# Altium PCB wius.PcbDoc
Units mm, origin at the board's own origin, x right, y up, seen from the top; angles counter-clockwise.
Board outline 54.2 x 28 mm, 6 copper layers (Top Layer, Int1 (GND), Int2 (Sign), Int3 (Sign), Int4 (PWR), Bottom Layer), stack 1.551 mm thick; 81 components, 82 nets, 371 pads, 7 vias.
Unrouted connection lines stored in the file: 174.
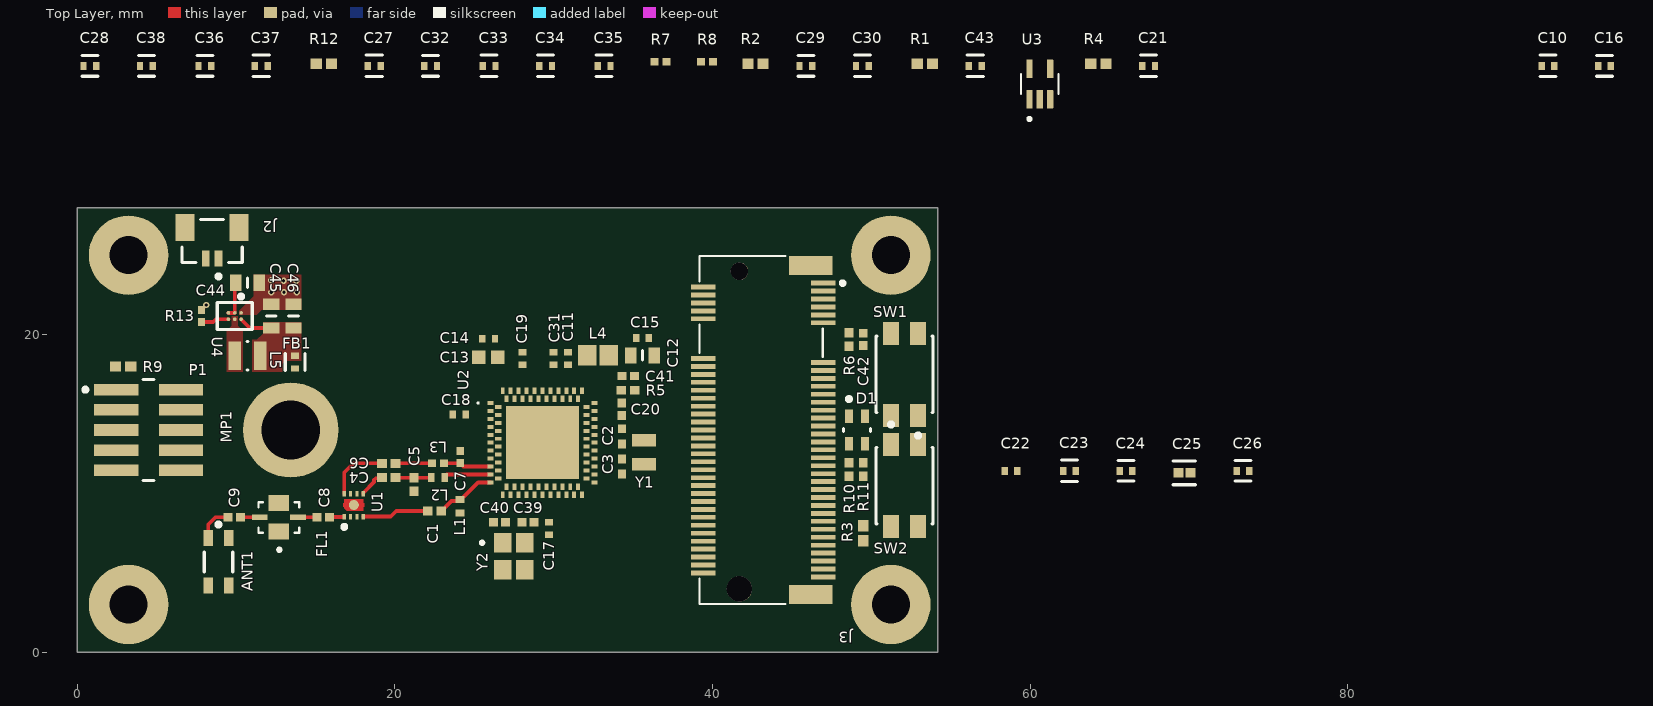
[diagram p0: Top Layer view]
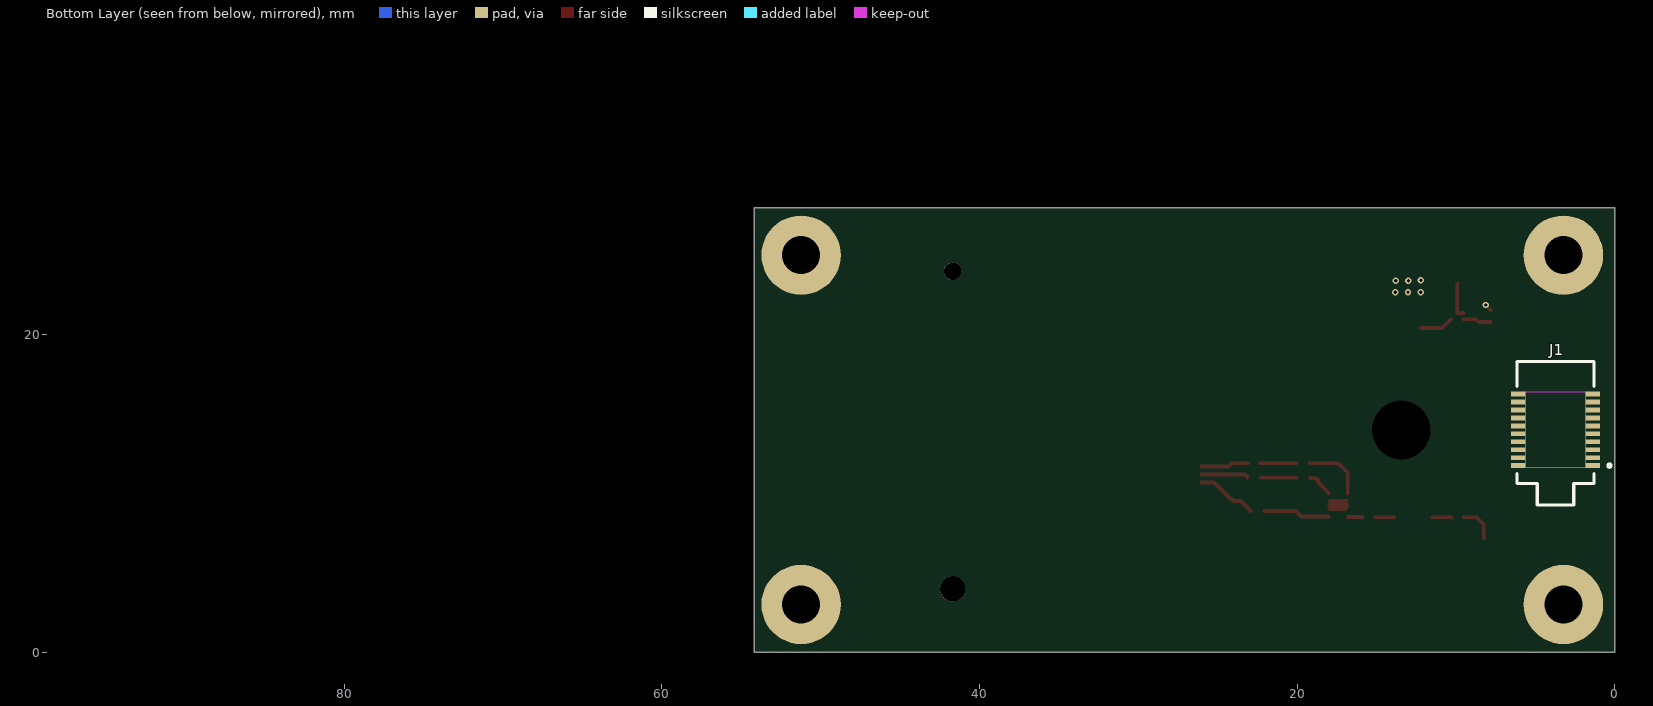
[diagram p1: Bottom Layer view, seen from below]
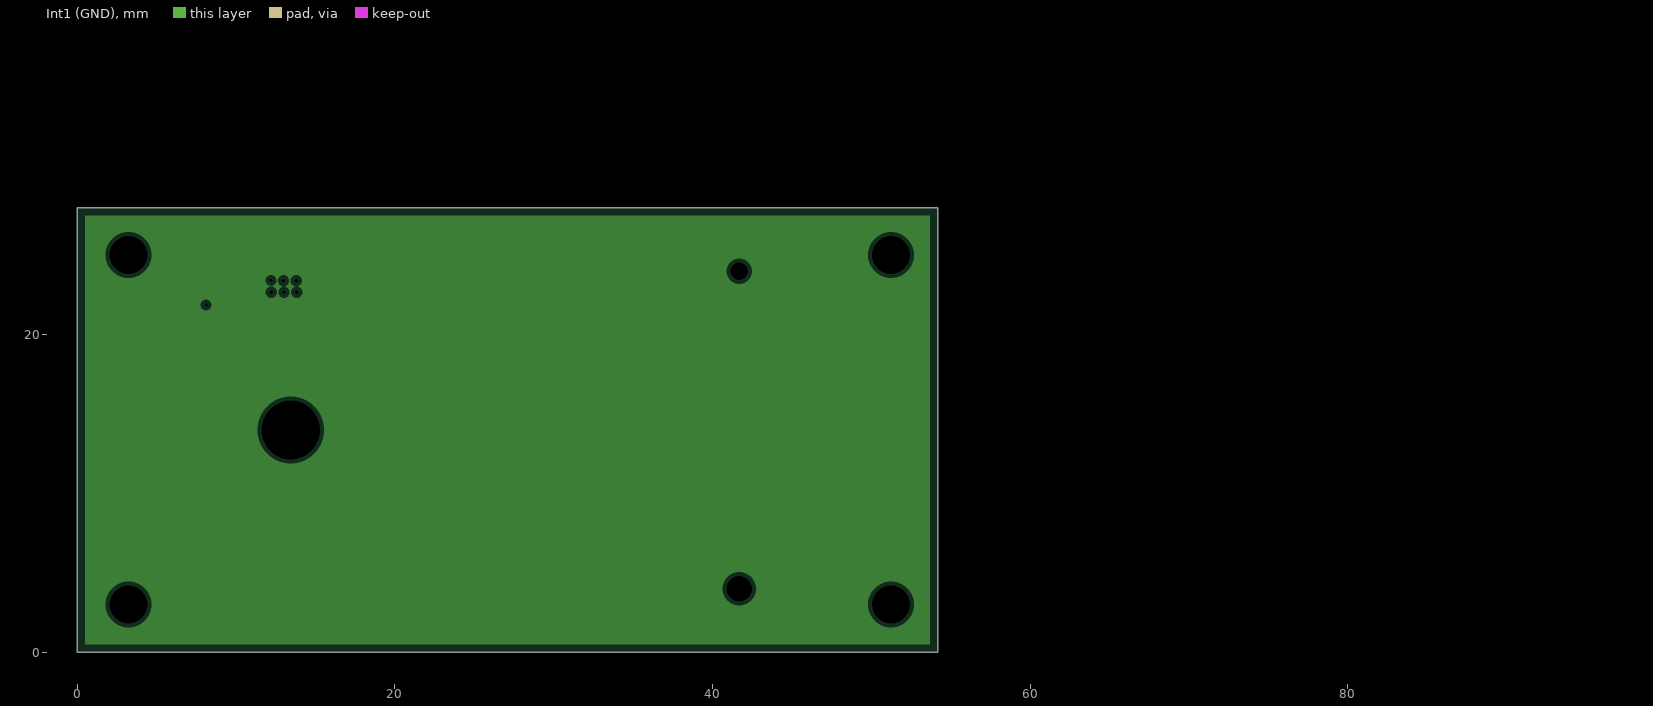
[diagram p2: Int1 (GND), clearances drawn from the general rule]
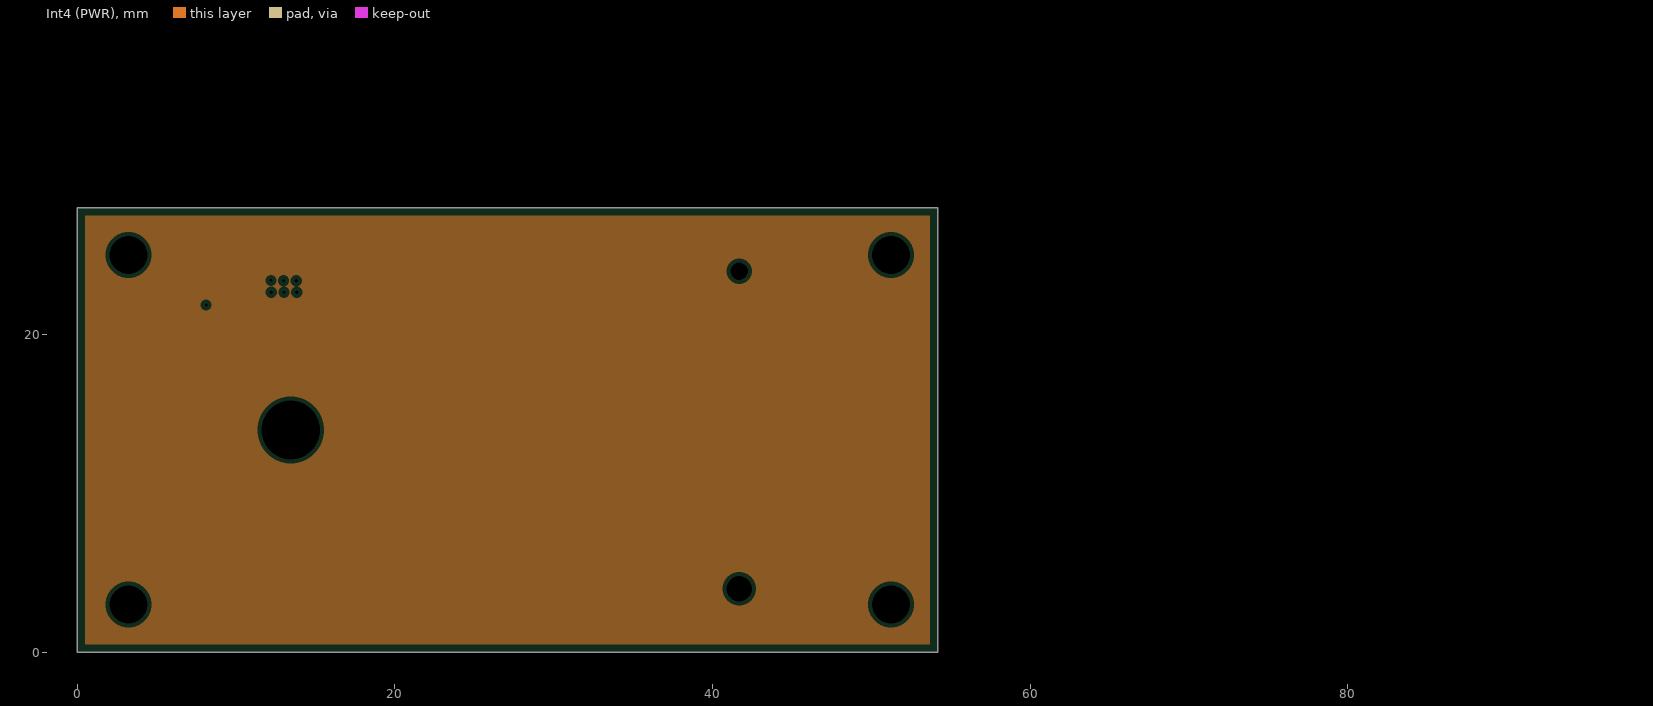
[diagram p3: Int4 (PWR), clearances drawn from the general rule]

## Layer stack, top to bottom
Top Solder: solder mask 0.0254, SM-001, Dk 4
Top Layer: signal copper 0.035
Dielectric 1: prepreg 0.0711, PP-006, Dk 4.1
Dielectric 2: prepreg 0.0711, PP-006, Dk 4.1
Int1 (GND): plane copper 0.035
Dielectric 3: core 0.4572, Core-035, Dk 4.7
Int2 (Sign): signal copper 0.035
Dielectric 4: prepreg 0.0711, PP-006, Dk 4.1
Dielectric 5: prepreg 0.0711, PP-006, Dk 4.1
Int3 (Sign): signal copper 0.035
Dielectric 6: core 0.4572, Core-035, Dk 4.7
Int4 (PWR): plane copper 0.035
Dielectric 7: prepreg 0.0711, PP-006, Dk 4.1
Dielectric 8: prepreg 0.0711, PP-006, Dk 4.1
Bottom Layer: signal copper 0.035
Bottom Solder: solder mask 0.0254, SM-001, Dk 4

## Board outline
0,0 0,28 54.2,28 54.2,0

## Design rules (kind name [scope] priority, off if disabled: settings)
BoardOutlineClearance [All] p1: gap=0 ignorepadtopadclearanceinfootprint=FALSE except(0.5: Arc-OutlineEdge Track-OutlineEdge SMDPad-OutlineEdge THPad-OutlineEdge Via-OutlineEdge Fill-OutlineEdge Poly-OutlineEdge Region-OutlineEdge Text-OutlineEdge)
Clearance [All] p1: gap=0.051 ignorepadtopadclearanceinfootprint=FALSE
ComponentClearance [All] p1: gap=0.17 collisioncheckmode=3 verticalgap=0.254 showdistances=FALSE
DiffPairsRouting [All] p1: maxlimit=0.27 minlimit=0.21 mostfreqgap=0.27 toplayer_maxgap=0.21 toplayer_prefgap=0.21 toplayer_minwidth=0.18 toplayer_maxwidth=0.18 toplayer_prefwidth=0.18 midlayer1_prefgap=0.254 midlayer1_minwidth=0.381 midlayer1_maxwidth=0.381 midlayer1_prefwidth=0.381 midlayer2_mingap=0.25 midlayer2_minwidth=0.11 midlayer2_maxwidth=0.11 midlayer2_prefwidth=0.11 bottomlayer_maxgap=0.21 bottomlayer_prefgap=0.21 bottomlayer_minwidth=0.18 bottomlayer_maxwidth=0.18 bottomlayer_prefwidth=0.18 maxuncoupledlength=50
FanoutControl Fanout_BGA [IsBGA] p1: bgadir=Out bgaviamode=Centered fanoutstyle=UnderPads fanoutdirection=Alternating viagrid=0.025 // Fanout_BGA (Default Rule)
Height [All] p1: minheight=0 maxheight=10 prefheight=1.524
HoleSize [All] p1: absolutevalues=TRUE maxlimit=5 minlimit=0.15 maxpercent=80.000 minpercent=20.000
MatchedLengths [All] p1: tolerance=0.1 checknetsindiffpair=TRUE checkdiffpairvsdiffpair=FALSE checkxsignals=FALSE checkothers=FALSE
MatchedLengths MatchedLengths_sdio [InNetClass('SDIO')] p2: tolerance=0.2 checknetsindiffpair=FALSE checkdiffpairvsdiffpair=TRUE checkxsignals=TRUE checkothers=TRUE
MatchedLengths MatchedLengths_spi_flash [InNetClass('SPI_FLASH')] p3: tolerance=0.2 checknetsindiffpair=FALSE checkdiffpairvsdiffpair=TRUE checkxsignals=TRUE checkothers=TRUE
MinimumAnnularRing MinimumAnnularRing_hole [All] p1: minimumring=0.127
MinimumAnnularRing MinimumAnnularRing_via [IsVia] p2: minimumring=0.076
MinimumSolderMaskSliver [All] p1: minsoldermaskwidth=0.076
PlaneClearance [All] p1: clearance=0.25
PlaneConnect [All] p1: pad.planeconnectstyle=Relief pad.reliefexpansion=0.16 pad.reliefentries=4 pad.reliefconductorwidth=0.16 pad.reliefairgap=0.16 via.planeconnectstyle=Direct via.reliefexpansion=0.16 via.reliefentries=4 via.reliefconductorwidth=0.16 via.reliefairgap=0.16
PolygonConnect PolygonConnect_1 [InNet('GND') vs (InPadClass('All Pads'))] p1: connectstyle=Relief reliefconductorwidth=0.254 reliefentries=4 polygonreliefangle="90 Angle" airgapwidth=0.2
PolygonConnect [Not InNet('GND') or Not InNet('AGND')] p2: connectstyle=Direct reliefconductorwidth=0.254 reliefentries=4 polygonreliefangle="90 Angle" airgapwidth=0.2
RoutingVias [All] p1: holewidth=0.2 width=0.4 viastyle="Through Hole" minholewidth=0.15 minwidth=0.302 maxholewidth=0.4 maxwidth=1.27
SilkToSilkClearance [All] p1: silktosilkclearance=0.01
SilkToSolderMaskClearance [IsPad] p1: minsilkscreentomaskgap=0.01 clearancetoexposedcopper=TRUE
SolderMaskExpansion SolderMaskExpansion_1 [isvia] p1: expansion=0.102 istentingtop=TRUE
SolderMaskExpansion [All] p2: expansion=0.015 istentingtop=FALSE
UnRoutedNet [All] p1: checkbadconnections=TRUE
ViasUnderSMD [All] p1: allowed=TRUE
Width "Schematic Width Constraint_13" [InNet('GND')] p1: maxlimit=0.237 minlimit=0.153 preferedwidth=0.237 toplayer_minwidth=0.237 midlayer1_maxwidth=0.153 midlayer1_prefwidth=0.153 midlayer2_maxwidth=0.153 midlayer2_prefwidth=0.153 bottomlayer_minwidth=0.237 impedanceprofiledriven=TRUE impedanceprofileid={907723B0-F067-4E6D-A726-1A265D9D0D74} impedanceprofilevalue=50.000000 minimp=50.000000 maximp=50.000000 favimp=50.000000
Width "Schematic Width Constraint_12" [InNet('VOUTLDOAFE')] p2: maxlimit=0.237 minlimit=0.153 preferedwidth=0.237 toplayer_minwidth=0.237 midlayer1_maxwidth=0.153 midlayer1_prefwidth=0.153 midlayer2_maxwidth=0.153 midlayer2_prefwidth=0.153 bottomlayer_minwidth=0.237 impedanceprofiledriven=TRUE impedanceprofileid={907723B0-F067-4E6D-A726-1A265D9D0D74} impedanceprofilevalue=50.000000 minimp=50.000000 maximp=50.000000 favimp=50.000000
Width "Schematic Width Constraint_10" [InNet('NetC8_1')] p3: maxlimit=0.237 minlimit=0.153 preferedwidth=0.237 toplayer_minwidth=0.237 midlayer1_maxwidth=0.153 midlayer1_prefwidth=0.153 midlayer2_maxwidth=0.153 midlayer2_prefwidth=0.153 bottomlayer_minwidth=0.237 impedanceprofiledriven=TRUE impedanceprofileid={907723B0-F067-4E6D-A726-1A265D9D0D74} impedanceprofilevalue=50.000000 minimp=50.000000 maximp=50.000000 favimp=50.000000
Width "Schematic Width Constraint_8" [InNet('NetC6_2')] p4: maxlimit=0.237 minlimit=0.153 preferedwidth=0.237 toplayer_minwidth=0.237 midlayer1_maxwidth=0.153 midlayer1_prefwidth=0.153 midlayer2_maxwidth=0.153 midlayer2_prefwidth=0.153 bottomlayer_minwidth=0.237 impedanceprofiledriven=TRUE impedanceprofileid={907723B0-F067-4E6D-A726-1A265D9D0D74} impedanceprofilevalue=50.000000 minimp=50.000000 maximp=50.000000 favimp=50.000000
Width "Schematic Width Constraint_7" [InNet('NetANT1_1')] p5: maxlimit=0.237 minlimit=0.153 preferedwidth=0.237 toplayer_minwidth=0.237 midlayer1_maxwidth=0.153 midlayer1_prefwidth=0.153 midlayer2_maxwidth=0.153 midlayer2_prefwidth=0.153 bottomlayer_minwidth=0.237 impedanceprofiledriven=TRUE impedanceprofileid={907723B0-F067-4E6D-A726-1A265D9D0D74} impedanceprofilevalue=50.000000 minimp=50.000000 maximp=50.000000 favimp=50.000000
Width "Schematic Width Constraint_6" [InNet('NetC9_1')] p6: maxlimit=0.237 minlimit=0.153 preferedwidth=0.237 toplayer_minwidth=0.237 midlayer1_maxwidth=0.153 midlayer1_prefwidth=0.153 midlayer2_maxwidth=0.153 midlayer2_prefwidth=0.153 bottomlayer_minwidth=0.237 impedanceprofiledriven=TRUE impedanceprofileid={907723B0-F067-4E6D-A726-1A265D9D0D74} impedanceprofilevalue=50.000000 minimp=50.000000 maximp=50.000000 favimp=50.000000
Width "Schematic Width Constraint_5" [InNet('NetL2_2')] p7: maxlimit=0.237 minlimit=0.153 preferedwidth=0.237 toplayer_minwidth=0.237 midlayer1_maxwidth=0.153 midlayer1_prefwidth=0.153 midlayer2_maxwidth=0.153 midlayer2_prefwidth=0.153 bottomlayer_minwidth=0.237 impedanceprofiledriven=TRUE impedanceprofileid={907723B0-F067-4E6D-A726-1A265D9D0D74} impedanceprofilevalue=50.000000 minimp=50.000000 maximp=50.000000 favimp=50.000000
Width "Schematic Width Constraint_4" [InNet('NetC6_1')] p8: maxlimit=0.237 minlimit=0.153 preferedwidth=0.237 toplayer_minwidth=0.237 midlayer1_maxwidth=0.153 midlayer1_prefwidth=0.153 midlayer2_maxwidth=0.153 midlayer2_prefwidth=0.153 bottomlayer_minwidth=0.237 impedanceprofiledriven=TRUE impedanceprofileid={907723B0-F067-4E6D-A726-1A265D9D0D74} impedanceprofilevalue=50.000000 minimp=50.000000 maximp=50.000000 favimp=50.000000
Width "Schematic Width Constraint_3" [InNet('NetC1_1')] p9: maxlimit=0.237 minlimit=0.153 preferedwidth=0.237 toplayer_minwidth=0.237 midlayer1_maxwidth=0.153 midlayer1_prefwidth=0.153 midlayer2_maxwidth=0.153 midlayer2_prefwidth=0.153 bottomlayer_minwidth=0.237 impedanceprofiledriven=TRUE impedanceprofileid={907723B0-F067-4E6D-A726-1A265D9D0D74} impedanceprofilevalue=50.000000 minimp=50.000000 maximp=50.000000 favimp=50.000000
Width "Schematic Width Constraint_2" [InNet('NetC4_2')] p10: maxlimit=0.237 minlimit=0.153 preferedwidth=0.237 toplayer_minwidth=0.237 midlayer1_maxwidth=0.153 midlayer1_prefwidth=0.153 midlayer2_maxwidth=0.153 midlayer2_prefwidth=0.153 bottomlayer_minwidth=0.237 impedanceprofiledriven=TRUE impedanceprofileid={907723B0-F067-4E6D-A726-1A265D9D0D74} impedanceprofilevalue=50.000000 minimp=50.000000 maximp=50.000000 favimp=50.000000
Width "Schematic Width Constraint_1" [InNet('NetC4_1')] p11: maxlimit=0.237 minlimit=0.153 preferedwidth=0.237 toplayer_minwidth=0.237 midlayer1_maxwidth=0.153 midlayer1_prefwidth=0.153 midlayer2_maxwidth=0.153 midlayer2_prefwidth=0.153 bottomlayer_minwidth=0.237 impedanceprofiledriven=TRUE impedanceprofileid={907723B0-F067-4E6D-A726-1A265D9D0D74} impedanceprofilevalue=50.000000 minimp=50.000000 maximp=50.000000 favimp=50.000000
Width "Schematic Width Constraint" [InNet('NetC7_1')] p12: maxlimit=0.237 minlimit=0.153 preferedwidth=0.237 toplayer_minwidth=0.237 midlayer1_maxwidth=0.153 midlayer1_prefwidth=0.153 midlayer2_maxwidth=0.153 midlayer2_prefwidth=0.153 bottomlayer_minwidth=0.237 impedanceprofiledriven=TRUE impedanceprofileid={907723B0-F067-4E6D-A726-1A265D9D0D74} impedanceprofilevalue=50.000000 minimp=50.000000 maximp=50.000000 favimp=50.000000
Width "Schematic Width Constraint_11" [InNet('NetANT1_1')] p13: maxlimit=0.375 minlimit=0.375 preferedwidth=0.375 impedanceprofiledriven=TRUE minimp=50.000000 maximp=50.000000 favimp=50.000000
Width "Schematic Width Constraint_9" [InNet('NetC1_2')] p14: maxlimit=0.375 minlimit=0.375 preferedwidth=0.375 impedanceprofiledriven=TRUE minimp=50.000000 maximp=50.000000 favimp=50.000000
Width Width_power_lines [InNetClass('Power')] p15: maxlimit=1 minlimit=0.051 preferedwidth=0.35 minimp=50.000000 maximp=50.000000 favimp=50.000000
Width [All] p16: maxlimit=1 minlimit=0.051 preferedwidth=0.2 toplayer_maxwidth=0.236 midlayer1_prefwidth=0.1 midlayer2_prefwidth=0.1 bottomlayer_maxwidth=0.236 minimp=50.000000 maximp=50.000000 favimp=50.000000
19 further rules are at their usual default settings.

## Classes and differential pairs
component class "SiWG917 POWER & I/O": C10 C11 C12 C13 C14 C16 C18 C19 C20 C21 C22 C23 C24 C25 C26 C27 C28 C29 C30 C31 C32 C33 C34 C35 C36 C37 C38 C39 C40 C43 L4 R1 R2 R4 R7 R8 R12 U2 U3 Y2
component class "RF FRONTEND & CLOCKS": ANT1 C1 C2 C3 C4 C5 C6 C7 C8 C9 FL1 L1 L2 L3 U1 Y1
component class "Power conversion": C44 C45 C46 FB1 J2 L5 R13 U4
component class "GAPmod interface": J3 MP1
component class "DEBUG, RESET & POC_IN, PROGRAMMING INTERFACE": C41 C42 D1 P1 R3 R5 R6 R9 R10 R11 SW1 SW2
component class Connectors: J1

## Components (designator, comment, footprint, x,y, rotation, side; value= is the part's Value field where it differs from the comment)
ANT1 "2450AT18D0100001E" FP-2450AT18D0100001E-MFG 8.9,5.7 r270 top
C1 "8.2p" FP-GJM155-0_05-IPC_B 22.5,8.9 r0 top
C2 "12p" FP-GRM155-0_05-MFG#1 34.3,13.6 r90 top
C3 "12p" FP-GRM155-0_05-MFG#1 34.3,11.7 r270 top
C4 "8.2p" FP-GJM155-0_05-IPC_B 19.621,11 r0 top
C5 "1.3p" FP-GJM155-0_05-IPC_B 21.221,10.571 r270 top
C6 "8.2p" FP-GJM155-0_05-IPC_B 19.621,11.9 r0 top
C7 "0.7p" FP-GJM155-0_05-IPC_C 24.121,12.3 r90 top
C8 "18p" CAPC1005X55X25LL05T10 15.5,8.5 r180 top
C9 "18p" CAPC1005X55X25LL05T10 9.9,8.5 r180 top
C10 "100n" FP-GRT155-0_05-MFG 92.621,36.93 r0 top
C11 "1u" FP-GRM155-0_05-MFG#2 30.9,18.5 r90 top
C12 "10u" CAPC1608X100N 35.6,18.7 r180 top
C13 "10u" FP-GRM188-0_15-IPC_C 25.879,18.57 r180 top
C14 "100n" FP-GRT155-0_05-MFG 25.912,19.746 r180 top
C15 "100n" FP-GRT155-0_05-MFG 35.6,19.8 r0 top
C16 "1u" FP-GRM155-0_05-MFG#2 96.177,36.93 r0 top
C17 "100n" FP-GRT155-0_05-MFG 29.7,7.8 r270 top
C18 "100n" FP-GRT155-0_05-MFG 24.062,14.965 r180 top
C19 "100n" FP-GRT155-0_05-MFG 28.046,18.504 r90 top
C20 "10n" CAPC1005X55X25LL05T10 34.3,15.3 r90 top
C21 "100n" FP-GRT155-0_05-MFG 67.475,36.93 r0 top
C22 "1u" FP-GRM155-0_05-MFG#2 58.804,11.43 r0 top
C23 "100n" FP-GRT155-0_05-MFG 62.487,11.43 r0 top
C24 "1u" FP-GRM155-0_05-MFG#2 66.043,11.43 r0 top
C25 "2.2u" FP-GRM155-0_2-IPC_C 69.726,11.303 r0 top
C26 "1u" FP-GRM155-0_05-MFG#2 73.409,11.43 r0 top
C27 "100n" FP-GRT155-0_05-MFG 18.707,36.93 r0 top
C28 "1u" FP-GRM155-0_05-MFG#2 0.8,36.93 r0 top
C29 "1u" FP-GRM155-0_05-MFG#2 45.885,36.93 r0 top
C30 "100n" FP-GRT155-0_05-MFG 49.441,36.93 r0 top
C31 "100n" FP-GRT155-0_05-MFG 30,18.5 r90 top
C32 "1u" FP-GRM155-0_05-MFG#2 22.263,36.93 r0 top
C33 "100n" FP-GRT155-0_05-MFG 25.946,36.93 r0 top
C34 "100n" FP-GRT155-0_05-MFG 29.502,36.93 r0 top
C35 "100n" FP-GRT155-0_05-MFG 33.185,36.93 r0 top
C36 "1u" FP-GRM155-0_05-MFG#2 8.039,36.93 r0 top
C37 "100n" FP-GRT155-0_05-MFG 11.595,36.93 r0 top
C38 "1u" FP-GRM155-0_05-MFG#2 4.356,36.93 r0 top
C39 "Capacitor 10 pF +/- 0.25 pF 50 V 0402" CAPC1005X55X30LL05T10 28.4,8.2 r0 top value=10pF
C40 "Capacitor 10 pF +/- 0.25 pF 50 V 0402" CAPC1005X55X30LL05T10 26.6,8.2 r180 top value=10pF
C41 "10n" CAPC1005X55X25LL05T10 34.7,17.4 r0 top
C42 "10n" CAPC1005X55X25LL05T10 49.5,19.7 r270 top
C43 "100n" FP-GRT155-0_05-MFG 56.553,36.93 r0 top
C44 "10u" CAPC1608X100N 10.725,23.275 r180 top
C45 "10u" CAPC1608X100N 12.225,21.175 r270 top
C46 "10u" CAPC1608X100N 13.625,21.175 r270 top
D1 "RED" FP-APTB1615SURKCGKC-F01-MFG 49.1,14 r90 top
FB1 "70m" FP-BLM15-0_05-MFG 13.725,18.275 r270 top
FL1 "2450BP15E0100E" FIL_2450BP15E0100E 12.7,8.5 r180 top
J1 "SS5-10-3.00-X-D-K-XX" SAMTEC_SS5-10-3.00-X-D-K-XX 3.74,14.01 r270 bottom locked
J2 "SM02B-SURS-TF(LF)(SN)" FP-SM02B-SURS-TF_LF_SN-MFG 8.5,25.9 r180 top
J3 "2199230-5" TE_2199230-5 41.7,14 r270 top locked
L1 "6.2n" FP-LQG15WH_02-IPC_C 24.1,9.2 r270 top
L2 "3.4n" FP-LQG15WH_02-IPC_C 22.721,11 r0 top
L3 "3.3n" FP-LQG15HH_02-IPC_C 22.721,11.9 r0 top
L4 "1u" FP-DFE201210U-IPC_C 32.8,18.7 r0 top
L5 "2.2u" FP-DFE201612C-MFG 10.725,18.675 r0 top
MP1 "9774025151R" 9774025151 13.45,14 r0 top
P1 "Mini Simplicity" SMTC-FTSH-105-01-L-DV-K_V 4.5,14 r270 top
R1 "Resistor 0R 0402 63 mW" RESC1005X40X25ML05T10 53.378,37.057 r0 top value=0
R2 "Resistor 0R 0402 63 mW" RESC1005X40X25ML05T10 42.71,37.057 r0 top value=0
R3 "100" RESC1005X40X25ML05T10 49.5,7.5 r90 top
R4 "Resistor 0R 0402 63 mW" RESC1005X40X25ML05T10 64.3,37.057 r0 top value=0
R5 "100k" RESC1005X40X25NL05T10 34.7,16.5 r0 top
R6 "100k" RESC1005X40X25NL05T10 48.6,19.7 r270 top
R7 "1k" RESC1005X40X25LL05T10 36.741,37.184 r0 top
R8 "1k" RESC1005X40X25LL05T10 39.662,37.184 r0 top
R9 "Resistor 0R 0402 63 mW" RESC1005X40X25ML05T10 2.9,18 r0 top value=0
R10 "280" RESC1005X40X25NL05T10 48.6,11.5 r90 top
R11 "280" RESC1005X40X25NL05T10 49.5,11.5 r90 top
R12 "Resistor 0R 0402 63 mW" RESC1005X40X25ML05T10 15.532,37.057 r0 top value=0
R13 "267k" RESC1005X40X25LL05T10 7.825,21.175 r270 top
SW1 "EVQ-P2402M" FP-EVQ-P2402M-MFG 52.1,17.5 r180 top
SW2 "EVQ-P2402M" FP-EVQ-P2402M-MFG 52.1,10.5 r0 top
U1 "SKY13317-373LF" FP-SKY13317-373LF-MFG 17.421,9.275 r90 top
U2 "IC RF TXRX+MCU WIFI BLE 84QFN" SIWG917M110LGTBA 29.3,13.2 r0 top
U3 "NC7SV17P5X" SOT65P210X110-5N 60.617,35.787 r90 top
U4 "TPS62840YBGR" FP-YBG0006-MFG 9.925,21.175 r270 top
Y1 "32.768KHZ" XTAL_CM8V-T1A-32.768KHZ-7PF-20PPM-TA-QC 35.7,12.6 r270 top
Y2 "FA-20H_40.0000MF10Z-K3" XTAL_FA-20H_40.0000MF10Z-K3 27.5,6.05 r0 top

## Footprints (in the part's own frame and the unit in brackets; to place one, negate y for a bottom-side part, rotate by r counter-clockwise, add the part's x,y. Pads: shape width x height; smd on the part's side, far side on the other; paste and mask are expansions set on the pad)
9774025151 [mm] "SMT Steel Spacer with internal Thread M2.5, height 2.5mm"
  round 6 / inner round 0 / far side round 0 hole 3.7 unplated: 1(0,0)
  body extent -2.55,-2.55 2.55,2.55, height 2.5
CAPC1005X55X25LL05T10 [mm] "Chip Capacitor, 2-Leads, Body 1.00x0.50mm, IPC High Density"
  rect 0.56x0.52 smd: 1(-0.39,0) 2(0.39,0)
  body extent -0.53,-0.28 0.53,0.28, height 0.55
CAPC1005X55X30LL05T10 [mm] "Chip Capacitor, 2-Leads, Body 1.05x0.55mm, IPC High Density"
  rect 0.56x0.52 smd: 1(-0.38,0) 2(0.38,0)
  body extent -0.53,-0.28 0.53,0.28, height 0.55
CAPC1608X100N [mm]
  rect 0.72x1.02 smd: 1(-0.75,0) 2(0.75,0)
  silkscreen extent 0,-0.3 0,0.3, body extent -0.8,-0.4 0.8,0.4, height 1
FIL_2450BP15E0100E [mm]
  rect 1.3x1 smd: 1(0,0.9) 3(0,-0.9)
  rect 1x0.35 smd: 2(1.2,0) 4(-1.2,0)
  silkscreen extent -1.28,-0.96 1.28,2.14
FP-2450AT18D0100001E-MFG [mm]
  rect 1x0.6 smd paste+0 mask+0: 1(-1.5,-0.65) 2(1.5,-0.65) 3(1.5,0.65) 4(-1.5,0.65)
  silkscreen extent -2.47,-0.9 0.63,0.9, body extent -2.1,-1.05 2.1,1.05, height 0.25
FP-APTB1615SURKCGKC-F01-MFG [mm]
  rect 0.85x0.5 smd paste+0 mask+0: 1(0.875,0.5) 2(-0.875,0.5) 3(0.875,-0.5) 4(-0.875,-0.5)
  silkscreen extent -0.08,-0.85 2.07,0.85, body extent -1.4,-0.95 1.4,0.95, height 0.25
FP-BLM15-0_05-MFG [mm]
  rect 0.4x0.5 smd paste+0 mask+0: 1(-0.4,0) 2(0.4,0)
  silkscreen extent -0.53,-0.63 0.52,0.63, body extent -0.7,-0.38 0.7,0.38, height 0.25
FP-DFE201210U-IPC_C [mm]
  rect 1.154x1.306 smd paste+0 mask+0: 1(-0.676,0) 2(0.676,0)
  body extent -1.35,-0.8 1.35,0.8, height 0.25
FP-DFE201612C-MFG [mm]
  rect 0.8x1.8 smd paste+0 mask+0: 1(-0.8,0) 2(0.8,0)
  silkscreen extent -0.03,-0.9 0.03,0.9, body extent -1.3,-1 1.3,1, height 0.25
FP-EVQ-P2402M-MFG [mm]
  rect 1x1.45 smd paste+0 mask+0: 1(-0.85,2.575) 2(0.85,2.575) 3(-0.85,-2.575) 4(0.85,-2.575)
  silkscreen extent -1.8,-2.4 1.8,3.97, body extent -1.9,-3.4 1.9,3.4, height 0.25
FP-GJM155-0_05-IPC_B [mm]
  rect 0.615x0.572 smd paste+0 mask+0: 1(-0.429,0) 2(0.429,0)
  body extent -0.89,-0.44 0.89,0.44, height 0.25
FP-GJM155-0_05-IPC_C [mm]
  rect 0.515x0.472 smd paste+0 mask+0: 1(-0.379,0) 2(0.379,0)
  body extent -0.74,-0.38 0.74,0.38, height 0.25
FP-GRM155-0_2-IPC_C [mm]
  rect 0.628x0.606 smd paste+0 mask+0: 1(-0.389,0) 2(0.389,0)
  silkscreen extent -0.7,-0.75 0.7,0.75, body extent -0.8,-0.45 0.8,0.45, height 0.25
FP-GRM155-0_05-MFG#1 [mm]
  rect 0.55x0.5 smd paste+0 mask+0: 1(-0.475,0) 2(0.475,0)
  body extent -0.85,-0.38 0.85,0.38, height 0.25
FP-GRM155-0_05-MFG#2 [mm]
  rect 0.4x0.5 smd paste+0 mask+0: 1(-0.4,0) 2(0.4,0)
  body extent -0.7,-0.38 0.7,0.38, height 0.25
FP-GRM188-0_15-IPC_C [mm]
  rect 0.856x0.858 smd paste+0 mask+0: 1(-0.601,0) 2(0.601,0)
FP-GRT155-0_05-MFG [mm]
  rect 0.4x0.5 smd paste+0 mask+0: 1(-0.4,0) 2(0.4,0)
  silkscreen extent -0.5,-0.67 0.5,0.67, body extent -0.7,-0.38 0.7,0.38, height 0.25
FP-LQG15HH_02-IPC_C [mm]
  rect 0.515x0.472 smd paste+0 mask+0: 1(-0.379,0) 2(0.379,0)
  body extent -0.74,-0.38 0.74,0.38, height 0.25
FP-LQG15WH_02-IPC_C [mm]
  rect 0.427x0.572 smd paste+0 mask+0: 1(-0.423,0) 2(0.423,0)
  body extent -0.74,-0.43 0.74,0.43, height 0.25
FP-SKY13317-373LF-MFG [mm]
  rect 0.35x0.2 smd paste+0 mask+0: 1(-0.725,0.6) 2(-0.725,0.2) 3(-0.725,-0.2) 4(-0.725,-0.6) 5(0.725,-0.6) 6(0.725,-0.2) 7(0.725,0.2) 8(0.725,0.6)
  round 0.63 smd paste+0 mask+0: 9(0,0)
  Top Layer region: 0.35,0.6 0.1,0.6 0.1,0.65 -0.1,0.65 -0.1,0.6 -0.2,0.6 -0.35,0.45 -0.35,-0.6 -0.1,-0.6 -0.1,-0.65 0.1,-0.65 0.1,-0.6 0.35,-0.6
  silkscreen extent -1.5,0.47 -1.25,0.72, body extent -1,-0.87 1,0.87, height 0.25
FP-SM02B-SURS-TF_LF_SN-MFG [mm]
  rect 0.5x1 smd paste+0 mask+0: 1(-0.4,1.1) 2(0.4,1.1)
  rect 1.2x1.7 smd paste+0 mask+0: 3(-1.7,-0.85) 4(1.7,-0.85)
  silkscreen extent -1.9,-1.35 1.9,2.35, body extent -2.4,-1.8 2.4,1.7, height 0.25
FP-YBG0006-MFG [mm]
  round 0.23 smd paste-1000 mask-1000: A1(-0.2,0.4) A2(0.2,0.4) B1(-0.2,0) B2(0.2,0) C1(-0.2,-0.4) C2(0.2,-0.4)
  silkscreen extent -1.35,-1.1 0.85,1.1, body extent -1,-1.25 1,1.25, height 0.25
RESC1005X40X25LL05T10 [mm] "Chip Resistor, 2-Leads, Body 1.00x0.50mm, IPC High Density"
  rect 0.5x0.45 smd: 1(-0.375,0) 2(0.375,0)
  body extent -0.53,-0.27 0.53,0.28, height 0.4
RESC1005X40X25ML05T10 [mm] "Chip Resistor, 2-Leads, Body 1.05x0.55mm, IPC Low Density"
  rect 0.7x0.65 smd: 1(-0.475,0) 2(0.475,0)
  body extent -0.53,-0.28 0.53,0.28, height 0.4
RESC1005X40X25NL05T10 [mm] "Chip Resistor, 2-Leads, Body 1.00x0.50mm, IPC Medium Density"
  rect 0.6x0.55 smd: 1(-0.425,0) 2(0.425,0)
  body extent -0.53,-0.27 0.53,0.28, height 0.4
SAMTEC_SS5-10-3.00-X-D-K-XX [mm]
  rect 0.3x0.93 smd: 01(2.25,2.335) 02(2.25,-2.335) 03(1.75,2.335) 04(1.75,-2.335) 05(1.25,2.335) 06(1.25,-2.335) 07(0.75,2.335) 08(0.75,-2.335) 09(0.25,2.335) 10(0.25,-2.335) 11(-0.25,2.335) 12(-0.25,-2.335) 13(-0.75,2.335) 14(-0.75,-2.335) 15(-1.25,2.335) 16(-1.25,-2.335) 17(-1.75,2.335) 18(-1.75,-2.335) 19(-2.25,2.335) 20(-2.25,-2.335)
  Top Layer keep-out region: 2.4,-1.87 -2.4,-1.87 -2.4,1.87 2.4,1.87
  Top Layer keep-out region: 2.4,-1.87 -2.4,-1.87 -2.4,1.87 2.4,1.87
  silkscreen extent -4.31,-2.42 4.73,3.5, body extent -4.06,-2.5 4.48,2.5, height 3.37
SIWG917M110LGTBA [mm]
  rect 0.4x0.25 smd: A1(-3.275,2.5) A2(-3.275,2) A3(-3.275,1.5) A4(-3.275,1) A5(-3.275,0.5) A6(-3.275,0) A7(-3.275,-0.5) A8(-3.275,-1) A9(-3.275,-1.5) A10(-3.275,-2) A11(-3.275,-2.5) A23(3.275,-2.5) A24(3.275,-2) A25(3.275,-1.5) A26(3.275,-1) A27(3.275,-0.5) A28(3.275,0) A29(3.275,0.5) A30(3.275,1) A31(3.275,1.5) A32(3.275,2) A33(3.275,2.5) B1(-2.775,2.25) B2(-2.775,1.75) B3(-2.775,1.25) B4(-2.775,0.75) B5(-2.775,0.25) B6(-2.775,-0.25) B7(-2.775,-0.75) B8(-2.775,-1.25) B9(-2.775,-1.75) B10(-2.775,-2.25) B21(2.775,-2.25) B22(2.775,-1.75) B23(2.775,-1.25) B24(2.775,-0.75) B25(2.775,-0.25) B26(2.775,0.25) B27(2.775,0.75) B28(2.775,1.25) B29(2.775,1.75) B30(2.775,2.25)
  rect 0.25x0.4 smd: A12(-2.5,-3.275) A13(-2,-3.275) A14(-1.5,-3.275) A15(-1,-3.275) A16(-0.5,-3.275) A17(0,-3.275) A18(0.5,-3.275) A19(1,-3.275) A20(1.5,-3.275) A21(2,-3.275) A22(2.5,-3.275) A34(2.5,3.275) A35(2,3.275) A36(1.5,3.275) A37(1,3.275) A38(0.5,3.275) A39(0,3.275) A40(-0.5,3.275) A41(-1,3.275) A42(-1.5,3.275) A43(-2,3.275) A44(-2.5,3.275) B11(-2.25,-2.775) B12(-1.75,-2.775) B13(-1.25,-2.775) B14(-0.75,-2.775) B15(-0.25,-2.775) B16(0.25,-2.775) B17(0.75,-2.775) B18(1.25,-2.775) B19(1.75,-2.775) B20(2.25,-2.775) B31(2.25,2.775) B32(1.75,2.775) B33(1.25,2.775) B34(0.75,2.775) B35(0.25,2.775) B36(-0.25,2.775) B37(-0.75,2.775) B38(-1.25,2.775) B39(-1.75,2.775) B40(-2.25,2.775)
  rect 4.6x4.6 smd: EP1(0,0)
  silkscreen extent -4.1,2.45 -4,2.55
SMTC-FTSH-105-01-L-DV-K_V [mm] "CONN, 10-Leads, Body 6.35x3.43mm, Pitch 1.27mm"
  rect 0.74x2.79 smd: 1(-2.54,-2.035) 2(-2.54,2.035) 3(-1.27,-2.035) 4(-1.27,2.035) 5(0,-2.035) 6(0,2.035) 7(1.27,-2.035) 8(1.27,2.035) 9(2.54,-2.035) 10(2.54,2.035)
  silkscreen extent -3.17,-4.1 3.17,0.34, body extent -3.17,-2.92 3.18,2.92, height 6.12
SOT65P210X110-5N [mm]
  rrect25% 1.19x0.4 smd: 1(-0.96,0.65) 2(-0.96,0) 3(-0.96,-0.65) 4(0.96,-0.65) 5(0.96,0.65)
  silkscreen extent -2.3,-1.17 0.63,1.17
TE_2199230-5 [mm]
  rect 0.3x1.55 smd: 1(-9.25,5.275) 2(-9,-2.275) 3(-8.75,5.275) 4(-8.5,-2.275) 5(-8.25,5.275) 6(-8,-2.275) 7(-7.75,5.275) 8(-7.5,-2.275) 9(-7.25,5.275) 10(-7,-2.275) 11(-6.75,5.275) 20(-4.5,-2.275) 21(-4.25,5.275) 22(-4,-2.275) 23(-3.75,5.275) 24(-3.5,-2.275) 25(-3.25,5.275) 26(-3,-2.275) 27(-2.75,5.275) 28(-2.5,-2.275) 29(-2.25,5.275) 30(-2,-2.275) 31(-1.75,5.275) 32(-1.5,-2.275) 33(-1.25,5.275) 34(-1,-2.275) 35(-0.75,5.275) 36(-0.5,-2.275) 37(-0.25,5.275) 38(0,-2.275) 39(0.25,5.275) 40(0.5,-2.275) 41(0.75,5.275) 42(1,-2.275) 43(1.25,5.275) 44(1.5,-2.275) 45(1.75,5.275) 46(2,-2.275) 47(2.25,5.275) 48(2.5,-2.275) 49(2.75,5.275) 50(3,-2.275) 51(3.25,5.275) 52(3.5,-2.275) 53(3.75,5.275) 54(4,-2.275) 55(4.25,5.275) 56(4.5,-2.275) 57(4.75,5.275) 58(5,-2.275) 59(5.25,5.275) 60(5.5,-2.275) 61(5.75,5.275) 62(6,-2.275) 63(6.25,5.275) 64(6.5,-2.275) 65(6.75,5.275) 66(7,-2.275) 67(7.25,5.275) 68(7.5,-2.275) 69(7.75,5.275) 70(8,-2.275) 71(8.25,5.275) 72(8.5,-2.275) 73(8.75,5.275) 74(9,-2.275) 75(9.25,5.275)
  rect 1.2x2.75 smd: SH1(-10.35,4.5) SH2(10.35,4.5)
  round 1.1 hole 1.1 unplated: ""(-10,0)
  round 1.6 hole 1.6 unplated: ""(10,0)
  silkscreen extent -10.95,-2.5 10.95,6.62, body extent -10.95,-2.85 10.95,5.85, height 4.1
XTAL_CM8V-T1A-32.768KHZ-7PF-20PPM-TA-QC [mm]
  rect 0.8x1.5 smd: 1(-0.75,0) 2(0.75,0)
  body extent -1,-0.6 1,0.6, height 0.6
XTAL_FA-20H_40.0000MF10Z-K3 [mm]
  rect 1.1x1.2 smd: 1(-0.7,0.85) 2(-0.7,-0.85) 3(0.7,-0.85) 4(0.7,0.85)
  silkscreen extent -2.1,0.75 -1.9,0.95, body extent -1,-1.25 1,1.25, height 0.55

## Part data
ANT1: library part CMP-00849-135603252-1, "2450AT18D0100001E 2.4 Ghz SMD Antenna Resiliant", Case/Package=1206, Max Frequency=2.5GHz, Max Operating Temperature=125°C, Min Operating Temperature=-40°C, Power Rating=3W, Bandwidth=100MHz, Gain=-1dB, Height=1.3mm, Impedance=50Ω, NexarPartId=135603252, Number of Bands=1, Return Loss=10dB
C1 C4 C6: library part CMP-2008-03885-2, "Multi-Layer Ceramic Capacitor 8.2pF C0G  ±0.1pF 0402 Paper T/R", Capacitance=8.2pF, Case Code (Imperial)=0402, Case Code (Metric)=1005, Dielectric=C0G, Max Operating Temperature=125°C, Min Operating Temperature=-55°C, Package Quantity=10000, Voltage Rating=50V, Case/Package=0402, Depth=0.5mm, Height=0.5mm, Lead Free="Lead Free", Length=1mm, Mount="Surface Mount", Packaging="Tape and Reel", Radiation Hardening=No, Termination=SMD/SMT, Thickness=0.022inch, Voltage Rating (DC)=50V, Width=0.02inch
C2 C3: library part CMP-2008-03945-2, "CAP CER 12PF 50V C0G/NP0 0402", Capacitance=12pF, Case Code (Imperial)=0402, Case Code (Metric)=1005, Dielectric=C0G, Max Operating Temperature=125°C, Min Operating Temperature=-55°C, Package Quantity=10000, Tolerance=2%, Voltage=50V, Case/Package=0402, Construction=Flat, Depth=0.5mm, Height=0.5mm, Lead Free="Lead Free", Length=1mm, Material=Ceramic, Mount="Surface Mount", Packaging="Tape and Reel", Radiation Hardening=No, REACH SVHC="No SVHC", Series=GRM, Termination=SMD/SMT, Thickness=0.022inch, Voltage Rating=50V, Voltage Rating (DC)=50V, Width=0.5mm
C5: library part CMP-2008-03818-2, "Multi-Layer Ceramic Capacitor 1.3pF C0G  ±0.05pF 0402 Paper T/R", Capacitance=1.3pF, Case Code (Imperial)=0402, Case Code (Metric)=1005, Dielectric=C0G, Max Operating Temperature=125°C, Min Operating Temperature=-55°C, Package Quantity=10000, Voltage Rating=50V, Case/Package=0402, Depth=0.5mm, Height=0.5mm, Lead Free="Lead Free", Length=0.039inch, Mount="Surface Mount", Packaging="Tape and Reel", Radiation Hardening=No, Termination=SMD/SMT, Thickness=0.022inch, Voltage Rating (DC)=50V, Width=0.02inch
C7: library part CMP-2008-03909-2, "Multi-Layer Ceramic Capacitor 0.7pF C0G  ±0.05pF 0402 Paper T/R", Capacitance=0.7pF, Case Code (Imperial)=0402, Case Code (Metric)=1005, Dielectric=C0G, Max Operating Temperature=125°C, Min Operating Temperature=-55°C, Package Quantity=10000, Voltage Rating=50V, Case/Package=0402, Depth=0.5mm, Height=0.5mm, Length=1mm, Mount="Surface Mount", Packaging="Tape and Reel", Radiation Hardening=No, Termination=SMD/SMT, Thickness=0.022inch, Voltage Rating (DC)=50V, Width=0.02inch
C8 C9: library part CMP-2008-04271-1, Manufacturer=Murata, Part Number=GRM1555C1H180GA01D
C10 C14 C15 C17 C18 C19 C21 C23 C27 C30 C31 C33 C34 C35 C37 C43: library part CMP-06035-014200-1, "Multi-Layer Ceramic Capacitor 100nF 50V X7R ±10% 0402 Paper T/R"
C11 C16 C22 C24 C26 C28 C29 C32 C36 C38: library part CMP-06035-025126-1, "Chip Multilayer Ceramic Capacitors for General Purpose, 0402, 1.0uF, X6S, 22%, 10%, 16V", Capacitance=1uF, Dielectric=X6S, Tolerance=10%, Voltage Rating (DC)=16V, Length=1mm, Thickness=500um, Width=500um
C12 C44 C45 C46: library part GMC10X7R106K10NT, "Cap Cer 10UF 10V X7R 0603", Manufacturer_Name=Cal-Chip, Supplier Part Number 1=4713-GMC10X7R106K10NTCT-ND, Datasheet Link=https://88ce57.p3cdn1.secureserver.net/wp-content/uploads/2023/01/gmc_series-2.pdf, Height=1mm, Manufacturer_Part_Number=GMC10X7R106K10NT, Supplier 1=Digikey
C13: library part CMP-06035-017494-1, "Chip Multilayer Ceramic Capacitors for General Purpose, 0603, 10uF, X5R, 15%, 20%, 16V", Capacitance=10uF, Case Code (Imperial)=0603, Case Code (Metric)=1608, Max Operating Temperature=85°C, Min Operating Temperature=-55°C, Tolerance=20%, Voltage Rating=16V, Case/Package=0603, Height=0.8mm, Lead Free="Lead Free", Length=0.063inch, Material=Ceramic, Mount="Surface Mount", Packaging="Cut Tape", Thickness=0.037inch, Voltage Rating (DC)=16V, Width=0.031inch
C20 C41 C42: library part CMP-1034-01880-2, Manufacturer=Murata, Part Number=GRM155R71E103KA01D
C25: library part CMP-06035-000377-1, "Chip Multilayer Ceramic Capacitors for General Purpose, 0402, 2.2uF, X7S, 22%, 10%, 10V", Capacitance=2.2uF, Case Code (Imperial)=0402, Case Code (Metric)=1005, Dielectric=X7S, Max Operating Temperature=125°C, Min Operating Temperature=-55°C, Package Quantity=10000, Resistor Type=Ceramic, Tolerance=10%, Voltage Rating=10V, Case/Package=0402, Height=0.5mm, Lead Free="Lead Free", Length=0.039inch, Mount="Surface Mount", Packaging="Tape and Reel", Termination=SMD/SMT, Thickness=0.022inch, Voltage Rating (DC)=10V, Weight=0.000212oz, Width=0.5mm
C39 C40: library part CMP-001-00011-6, "Chip Capacitor, 10 pF, +/- 0.25 pF, 50 V, 0402 (1005 Metric)", Capacitor Type=Ceramic, Case/Package=0402, Max Operating Temperature=125°C, Min Operating Temperature=-55°C, Tolerance=0.25%, Voltage Rating=50V, Mounting Technology=SM, Pins=2, RoHS Compliant=True
D1: library part CMP-44529-000005-1, "LED GREEN/RED CLEAR CHIP SMD", Colour="Red, Green", Forward Current=20mA, Forward Voltage=1.95/2.1V, Manufacturer=Kingbright, Manufacturer Part Number=APTB1615SURKCGKC-F01, Max Junction Temp=+115°C, Power Dissipation=75mW, Reverse Voltage=5V, Temperature="-40°C to +85°C", Temperature Range High=+85°C, Temperature Range Low=-40°C, Automotive=No, Category=Diode, ComponentLink2Description=Datasheet, ComponentLink2URL=http://www.kingbrightusa.com/images/catalog/SPEC/APTB1615SURKCGKC-F01.pdf, Device Class L1=Optoelectronics, Device Class L2=LEDs, Device Class L3=unset, Digikey Description="LED GREEN/RED CLEAR CHIP SMD", Height=0.9mm, Lead Free=Yes, Led Orientation="Top View", Luminous Intensity=200/50mcd, Octopart=https://octopart.com/aptb1615surkcgkc-f01-kingbright-5355651, Package=APTB1615SURKCGKC-F01, Peak Emmision Wavelength=645/574nm, RoHS=TRUE, Viewing Angle=150°, Wavelength=630/570nm
FB1: library part CMP-0686-00284-4, "Chip Ferrite Bead, 0402, 80Ω @ 100MHz, 0.07Ω, 25%, 1.5A", Case Code (Imperial)=0402, Case Code (Metric)=1005, Current Rating=1.5A, DC Resistance (DCR)=70mR, Max Operating Temperature=125°C, Min Operating Temperature=-55°C, Package Quantity=1, Test Frequency=100MHz, Tolerance=25%, Case/Package=0402, DC Resistance-Max=70mR, Depth=0.5mm, Height=0.5mm, Impedance=80R, Lead Free="Lead Free", Length=1mm, Material=Ferrite, Max Current Rating=1.5A, Max DC Current=1.5A, Number of Circuits=1, Number of Lines=1, Number of Pins=2, Packaging="Tape and Reel", REACH SVHC="No SVHC", RoHS Compliant=Yes, Series=BLM15PD, Termination=SMD/SMT, Width=0.5mm
FL1: "Ceramic Filters Band Pass 1.5dB 50Ohm SMD 4Pin T/R", Package=None, Supplier Part Number 1=712-2450BP15E0100001ECT-ND, Availability=Unavailable, MF="{'manufacturer': u'Johanson Technology'}", MP=2450BP15E0100E, Price=None, Supplier 1=Digikey, Supplier 2=Farnell, Supplier Part Number 2=2148528
J1: "0.50mm Socket Strip Assembly", Package=None, Availability=Unavailable, MF="Samtec Inc.", MP=SS5-10-3.00-X-D-K-XX, Price=None
J2: library part CMP-17439-000279-1, "CONN HEADER SMD R/A 2POS 0.8MM", Color=Natural, Current Rating=500mA, Flammability Rating="UL94 V-0", Max Operating Temperature=85°C, Min Operating Temperature=-25°C, Voltage Rating=30V, Body Plating=Tin, Connector Type=Header, Contact Finish - Mating=TIN, Contact Material="Copper Alloy", Contact Plating=Tin, Contact Shape=Rectangular, Contact Type="Outer Shroud Contact", Fastening Type=Pull, Gender=Male, Insulation Color=Natural, Insulation Material=Nylon, Lead Free="Lead Free", Lead Pitch=0.8mm, Material=Polyamide, Mount="Surface Mount", Number of Contacts=2, Number of Poles=2, Number of Positions=2, Number of Rows=1, Orientation=Horizontal, Packaging="Cut Tape", Pitch=0.8mm, REACH SVHC="No SVHC", Series=SUR, Termination=Solder, Wire/Cable Gauge=32AWG, Working Voltage=30V
J3: "Conn Card Edge 67 POS 0.5mm Solder RA SMD Embossed T/R", Package=None, Availability=Unavailable, MF="{'manufacturer': u'TE Connectivity'}", MP=2199230-5, Price=None
L1: library part CMP-06042-015013-1, "Multilayer type Inductor for Automotive 6.2nH ±0.1nH 0.13Ω 700mA 0402"
L2: library part CMP-06042-011399-1, "Multilayer type Inductor for Automotive 3.4nH ±0.1nH 0.09Ω 900mA 0402"
L3: library part CMP-06042-003843-1, "Multilayer type RF Inductor 3.3nH ±0.3nH 0.12Ω 800mA 0402", Case Code (Imperial)=0402, Case Code (Metric)=1005, Current=300mA, DC Resistance (DCR)=190mR, Inductance=3.3nH, Max Operating Temperature=125°C, Min Operating Temperature=-55°C, Package Quantity=10000, Self Resonant Frequency=6GHz, Test Frequency=100MHz, Case/Package=0402, Core Material=Air, Current Rating=300mA, DC Current=300mA, Depth=0.55mm, Height=0.5mm, Height - Seated (Max)=0.022inch, Lead Free="Lead Free", Length=0.039inch, Max DC Current=300mA, Military Standard=Not, Mount="Surface Mount", Packaging="Tape and Reel", Q Factor=8, Radiation Hardening=No, REACH SVHC="No SVHC", Shielding=Unshielded, Termination=SMD/SMT, Width=0.02inch
L4: library part CMP-06042-016601-1, "FIXED IND 1.0UH 2.0A 95MOHM", RoHS Compliant=Yes
L5: library part CMP-06042-009962-1, "Shielded Wirewound Inductor 2.2uH 20% 1800mA 0.116Ω 0806 (2016)"
MP1: library part CMP-03913-59774856-1, "9774025151R Spacer Material: Steel Mounting: SMT Series: WA-SMSI Thread D: M2.5", Max Operating Temperature=150°C, Min Operating Temperature=-55°C, Height=2.6mm, Length=2.5mm, Material=Steel, NexarPartId=59774856, Outside Diameter=5.1054mm, Packaging="Tape and Reel", Plating=Tin, REACH SVHC=Unknown, RoHS=Compliant, Threaded/Unthreaded=Threaded
P1: library part CMP-2000-05352-1, "Male Header, Pitch 1.27 mm, 2 x 5 Position, Height 6.12 mm, RoHS, Tube", Color=Black, Manufacturer=Samtec, Package Description="Male Header, Pitch 1.27 mm, 2 x 5 Position, Height 5.97 mm, Tail Length 4.32 mm", Package Reference=FTSH-105-01-L-DV-K, Category=Connectors,Interconnects, Connector Type=Header,Shrouded, Contact Finish=Gold, Contact Finish Thickness=3µin(0.08µm), Contact Mating Length="0.120\"(3.05mm)", Contact Type=MalePin, Datasheet URL=http://suddendocs.samtec.com/prints/ftsh-1xx-xx-xxx-dv-xxx-mkt.pdf, Datasheet Version="Rev. ET, 10/1995", Family=RectangularConnectors-Headers,MalePins, Fastening Type=-, Features=-, Manufacturer URL=http://www.samtec.com/, Mounting Type=SurfaceMount, Number of Positions=10, Number of Positions Loaded=All, Number of Rows=2, Package URL=http://suddendocs.samtec.com/prints/ftsh-1xx-xx-xxx-dv-xxx-footprint.pdf, Packaging=Tube, Pitch="0.050\"(1.27mm)", Row Spacing="0.050\"(1.27mm)", Series=FTSH, Termination=Solder
R1 R2 R4 R9 R12: library part CMP-009-00004-5, "Chip Resistor, 0 Ohm, 0.063 W, -55 to 155 degC, 0402 (1005 Metric)", Case/Package=0402, Max Operating Temperature=155°C, Min Operating Temperature=-55°C, Power=63mW, Voltage Rating=50V, Mounting Technology=SM, Pins=2, RoHS Compliant=True
R3: library part CMP-2002-07344-1, Manufacturer="Yageo / Phycomp", Part Number=RC0402FR-07100RL
R5 R6: library part CMP-2002-07343-1, Manufacturer="Yageo / Phycomp", Part Number=RC0402FR-07100KL
R7 R8: library part CMP-2002-07865-1, Manufacturer=Yageo, Part Number=RC0402FR-131KL
R10 R11: library part CMP-1011-00446-2, Manufacturer=Yageo, Part Number=RC0402FR-07280RL
R13: library part CMP-2002-07544-1, Manufacturer=Yageo, Part Number=RC0402FR-07267KL
SW1 SW2: library part CMP-05618-000087-1, "SWITCH TACTILE SPST-NO 0.02A 15V", Actuator Color=Natural, Color=Clear, Contact Current Rating=20mA, Contact Resistance=100mR, Max Operating Temperature=85°C, Max Voltage Rating (DC)=15V, Min Operating Temperature=-40°C, Operating Force=2.4N, Package Quantity=1, Actuator Length=0.45mm, Current Rating=20mA, Depth=5.5mm, Electrical Life=500000Cycles, Height=2.1mm, Illumination Type=Non-Illuminated, Lead Free="Lead Free", Length=3.5mm, Max Current Rating=20mA, Mechanical Life=500000Cycles, Mount="Surface Mount", Orientation=Straight, Packaging="Tape and Reel", Radiation Hardening=No, REACH SVHC="No SVHC", RoHS Compliant=Yes, Series=EVQP2, Size=3.5mm, Switch Function=Off-Mom, Switch Travel=0.25mm, Termination=J-Bend, Throw Configuration=SPST, Voltage Rating (DC)=15V, Width=3.5mm
U1: library part CMP-85923-000011-1, "IC RF SWITCH SP3T 6GHZ 8MLP", Case/Package=QFN, Frequency=6GHz, Max Operating Temperature=100°C, Min Operating Temperature=-40°C, Operating Frequency="20 MHz to 6 GHz", Package Quantity=3000, Test Frequency=5.9GHz, IIP3=50dBm, Impedance=50R, Insertion Loss=0.8dB, Max Frequency=6GHz, Mount="Surface Mount", Number of Pins=8, Number of Switches=1, P1dB=26dBm, Packaging="Tape and Reel", Radiation Hardening=No, RoHS Compliant=Yes, Series=-, Technology=GAAS, Throw Configuration=SP3T, Turn-Off Delay Time=20ns, Turn-On Delay Time=55ns
U2: library part SIWG917
U3: "Buffer, Non-Inverting 1 Element 1 Bit per Element Push-Pull Output SC-70-5", Package=None, Availability=Unavailable, MF="{'manufacturer': u'ON Semiconductor'}", MP=NC7SV17P5X, Price=None
U4: library part CMP-04918-000401-1, "ULTRA LOW IQ BUCK CONVERTER"
Y1: library part CM8V-T1A-32.768KHZ-7PF-20PPM-TA-QC, Package=None, Availability=Unavailable, MF="{'manufacturer': u'Micro Crystal'}", MP=CM8V-T1A-32.768KHZ-7PF-20PPM-TA-QC, Price=None, Supplier 1="Arrow Electronics", Supplier Part Number 1=CM8V-T1A-32.768KHZ-7PF-20PPM-TA-QC
Y2: Package=None, Supplier Part Number 1=6169727, Availability=Unavailable, MF="{'manufacturer': u'EPSON'}", MP="FA-20H 40.0000MF10Z-K3", Price=None, Supplier 1="Future Electronics"

## Free pads (board coordinates)
  round 5 / inner round 3 / far side round 5 hole 2.4: 1(3.24,3.01) 1(3.24,25.01) 1(51.24,3.01) 1(51.24,25.01)

## Via types
v1: diameter 0.4, hole 0.2, Top Layer to Bottom Layer, tented both sides, 7 vias

## Nets (pads, with @x,y where several pads share a name; then routed paths per layer and width w, separated by ;. In a path a pad name is that pad's centre, name@x,y a point inside that pad or via, vN(x,y) a via of type N, cw(c..) or ccw(c..) an arc to the next point about the centre after c; other vN are vias at no path point)
3V3: C36.1 C37.1 D1.1 D1.3 FB1.2 R12.2 U2.B8
GND: ANT1.2 ANT1.3 ANT1.4 C2.2 C3.2 C5.2 C7.2 C10.2 C11.2 C12.1 C13.2 C14.2 C15.2 C16.2 C17.2 C18.2 C19.2 C21.2 C22.1 C23.2 C24.2 C25.2 C26.2 C27.2 C28.2 C29.2 C30.2 C31.2 C32.2 C33.2 C34.2 C35.2 C36.2 C37.2 C38.2 C39.2 C40.2 C41.2 C42.2 C43.2 C44.1 C45.1 C46.1 FL1.1 FL1.3 J1.09 J1.11 J1.13 J2.1 P1.2 pad.1 R3.1 R13.1 SW1.3 U1.9 U2.A15 U2.EP1 U3.3 U4.A1 Y2.2 Y2.4 | length 0.4
  Top Layer w0.236: R13.1 7.825,21.575 v1(8.125,21.875)
  other v1: 12.225,22.675 13.025,22.675 13.825,22.675 13,23.4 13.8,23.4 12.216,23.426
NetANT1_1: ANT1.1 C9.2 | length 2.3
  Top Layer w0.237: ANT1.1 8.25,8.05 8.7,8.5 C9.2
NetC1_1: C1.1 U1.4 | length 4.2
  Top Layer w0.237: U1.4 19.75,8.55 20.1,8.9 C1.1
NetC1_2: C1.2 L1.1 U2.A11 | length 3.8
  Top Layer w0.237: C1.2 22.95,8.9 23.577,9.527 24.005,9.527 L1.1 24.173,9.623 25.25,10.7 U2.A11
NetC2_1: C2.1 U2.A29 Y1.1
NetC3_1: C3.1 U2.B26 Y1.2
NetC4_1: C4.1 U1.5 | length 1.7
  Top Layer w0.237: U1.5 18.021,10.038 18.7,10.717 18.7,10.861 18.802,10.964 19.156,10.964 C4.1
NetC4_2: C4.2 C5.1 L2.1 | length 2.2
  Top Layer w0.237: C4.2 C5.1 L2.1
NetC6_1: C6.1 U1.8 | length 3.9
  Top Layer w0.237: U1.8 16.821,11.321 17.4,11.9 C6.1
NetC6_2: C6.2 L3.1 | length 2.3
  Top Layer w0.237: C6.2 L3.1
NetC7_1: C7.1 L3.2 U2.A9 | length 3
  Top Layer w0.237: L3.2 23.111,11.911 24.111,11.911 C7.1 ; C7.1@24.121,11.9 24.321,11.7 U2.A9
NetC8_1: C8.1 U1.1 | length 1
  Top Layer w0.237: C8.1 15.915,8.525 16.803,8.525 16.821,8.543 U1.1
NetC8_2: C8.2 FL1.4 | length 1.2
  Top Layer w0.237: FL1.4 C8.2
NetC9_1: C9.1 FL1.2 | length 1.2
  Top Layer w0.237: C9.1 FL1.2
NetC20_1: C20.1 U2.B28
NetC20_2: C20.2 U2.A32
NetC22_2: C22.2 C23.1 U2.A2 U2.B32
NetC24_1: C24.1 U2.B34
NetC25_1: C25.1 U2.B23
NetC26_1: C26.1 U2.A28
NetC29_1: C29.1 C30.1 R1.2 U2.A12
NetC32_1: C32.1 C33.1 C34.1 C35.1 R2.2 U2.A8 U2.A14 U2.B11
NetC39_1: C39.1 U2.B12 Y2.3
NetC40_1: C40.1 U2.A13 Y2.1
NetC41_1: C41.1 R5.1 U2.A31
NetC42_1: C42.1 P1.3 R6.1 SW1.4 U2.A27
NetC45_2: C45.2 C46.2 FB1.1 L5.2 U4.A2 | length 2.1
  Top Layer w0.236: U4.A2 10.875,20.425 C45.2
NetD1_2: D1.2 R10.2
NetD1_4: D1.4 R11.2
NetJ1_02: J1.02 U2.B35
NetJ1_04: J1.04 U2.A1
NetJ1_06: J1.06 R4.2 U3.4
NetJ1_07: J1.07 R7.1 U2.A22
NetJ1_08: J1.08 U2.B39
NetJ1_10: J1.10 U2.A36
NetJ1_12: J1.12 R8.1 U2.B18
NetJ1_14: J1.14 U2.B22
NetJ1_15: J1.15 U2.A38
NetJ1_16: J1.16 U2.A40
NetJ1_17: J1.17 U2.A39
NetJ1_18: J1.18 U2.A23
NetJ1_19: J1.19 U2.B36
NetJ1_20: J1.20 U2.A37
NetL2_2: L2.2 U2.A10 | length 3
  Top Layer w0.237: L2.2 23.144,11.073 23.271,11.2 U2.A10
NetL4_1: L4.1 U2.B29
NetL5_1: L5.1 U4.B2
NetP1_1: P1.1 R9.1
NetP1_4: P1.4 U2.A24
NetP1_5: P1.5 U2.B17
NetP1_6: P1.6 SW2.4 U2.B15
NetP1_7: P1.7 U2.A16
NetP1_8: P1.8 U2.A17
NetR3_2: R3.2 SW2.3
NetR4_1: R4.1 U2.B40 U3.2
NetR6_2: R6.2 U2.B25
NetR10_1: R10.1 U2.B3
NetR11_1: R11.1 U2.B10
NetR13_2: R13.2 U4.C2 | length 1.8
  Top Layer w0.236: R13.2 8.575,20.8 8.75,20.975 U4.C2
NetU1_3: U1.3 U2.A35
NetU1_6: U1.6 U2.A19
NetU1_7: U1.7 U2.B21
NetU2_A5: U2.A5
NetU2_A6: U2.A6
NetU2_A7: U2.A7
NetU2_A20: U2.A20
NetU2_A21: U2.A21
NetU2_A25: U2.A25
NetU2_B4: U2.B4
NetU2_B5: U2.B5
NetU2_B6: U2.B6
NetU2_B7: U2.B7
NetU2_B19: U2.B19
NetU2_B20: U2.B20
NetU2_B24: U2.B24
NetU2_B27: U2.B27
NetU2_B37: U2.B37
VBAT: C44.2 J2.2 U4.B1 U4.C1 | length 2.3
  Top Layer w0.236: U4.C1 U4.B1 C44.2@9.925,23.225
VBUS: C10.1 C13.1 C14.1 C16.1 C21.1 C27.1 C28.1 C31.1 C43.1 J1.01 J1.03 J1.05 R1.1 R5.2 R7.2 R8.2 R9.2 R12.1 U2.A3 U2.A26 U2.A30 U2.A33 U2.B1 U2.B14 U2.B31 U2.B33 U3.5
VOUTBCKDC: C12.2 C15.1 L4.2 R2.1 U2.B30
VOUTLDOAFE: C38.1 L1.2 U2.B13
VOUTLDOSOC: C11.1 C17.1 C18.1 C19.1 U2.A18 U2.A34 U2.B2 U2.B38
pads on no net: J2.3 J2.4 J3. J3.1 J3.2 J3.3 J3.4 J3.5 J3.6 J3.7 J3.8 J3.9 J3.10 J3.11 J3.20 J3.21 J3.22 J3.23 J3.24 J3.25 J3.26 J3.27 J3.28 J3.29 J3.30 J3.31 J3.32 J3.33 J3.34 J3.35 J3.36 J3.37 J3.38 J3.39 J3.40 J3.41 J3.42 J3.43 J3.44 J3.45 J3.46 J3.47 J3.48 J3.49 J3.50 J3.51 J3.52 J3.53 J3.54 J3.55 J3.56 J3.57 J3.58 J3.59 J3.60 J3.61 J3.62 J3.63 J3.64 J3.65 J3.66 J3.67 J3.68 J3.69 J3.70 J3.71 J3.72 J3.73 J3.74 J3.75 J3.SH1 J3.SH2 MP1.1 P1.9 P1.10 SW1.1 SW1.2 SW2.1 SW2.2 U1.2 U2.A4 U2.A41 U2.A42 U2.A43 U2.A44 U2.B9 U2.B16 U3.1

## Polygon pours and split planes (outlines as drawn)
NetL5_1 on Top Layer "NETL5_1_L01_P000" (solid, pour order 0): 10.113,21.171 10.109,21.175 9.725,21.175 9.725,20.575 9.525,20.375 9.425,20.275 9.425,17.675 10.425,17.675 10.425,20.275 10.125,20.575 10.125,21.175
GND on Top Layer "GND_L01_P005" (solid, pour order 5): 11.125,22.421 10.201,21.497 10.201,21.256 11.306,21.256 11.625,21.575 14.125,21.575 14.125,23.775 11.125,23.775
NetC45_2 on Top Layer "NETC45_2_L01_P001" (solid, pour order 1): 11.025,17.675 12.925,17.675 12.925,18.175 13.125,18.375 14.125,18.375 14.125,20.775 11.725,20.775 11.725,20.075 11.325,19.675 11.025,19.675
no net on Int1 (GND) (split plane): 53.69,0.51 0.51,0.51 0.51,27.49 53.69,27.49
no net on Int4 (PWR) (split plane): 53.69,0.51 0.51,0.51 0.51,27.49 53.69,27.49